# Altium PCB PCB.PcbDoc
Units mil, origin at the board's own origin, x right, y up, seen from the top; angles counter-clockwise.
Board outline 1600 x 1700 mil, 4 copper layers (L1 (Signal), L2 (GND), L3 (GND), L4 (Signal)), stack 61.811 mil thick; 9 components, 7 nets, 25 pads, 2 vias.
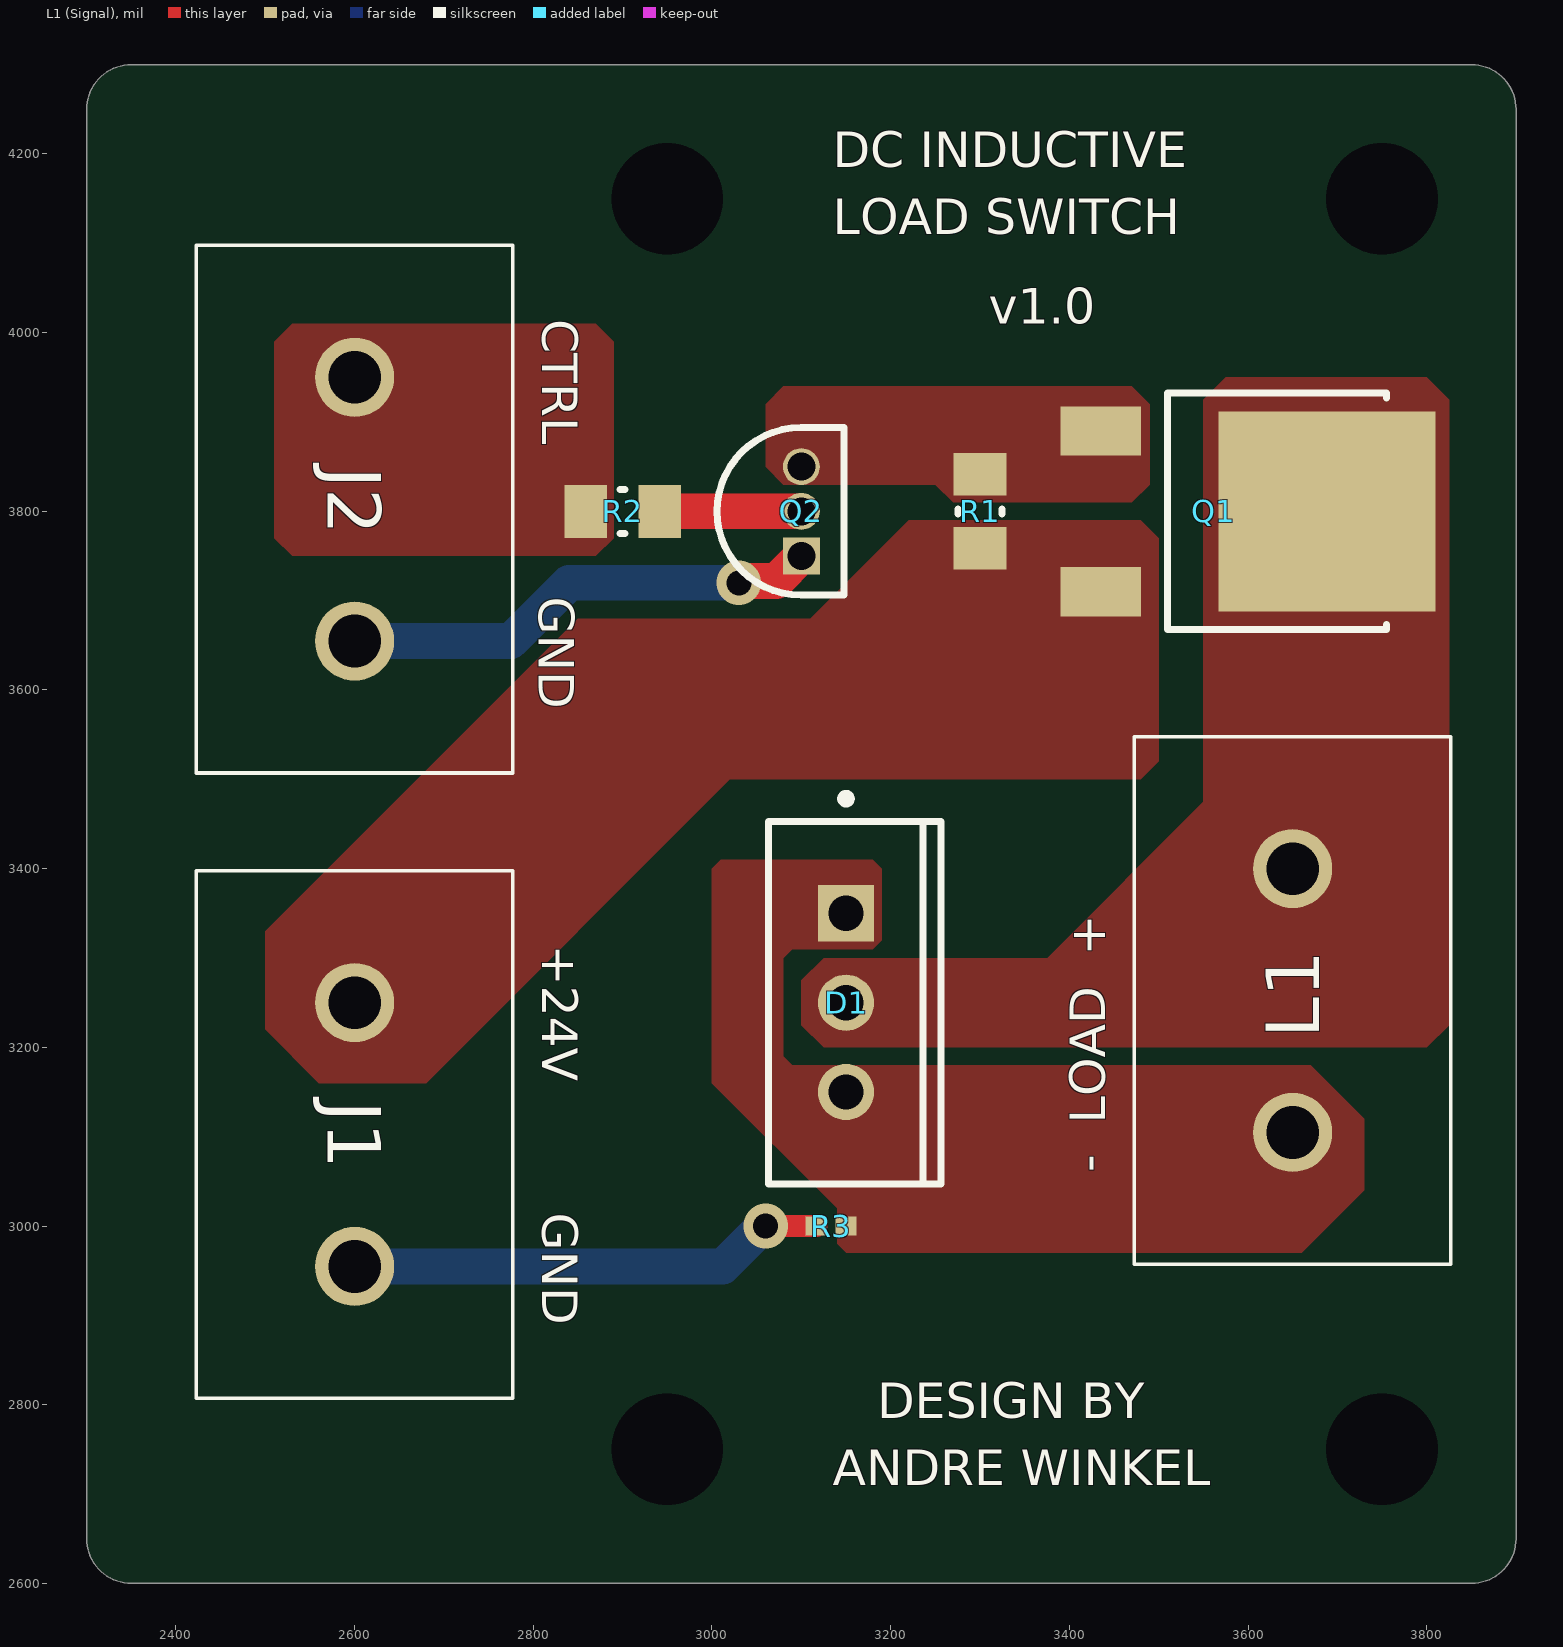
[diagram p0: L1 (Signal) view]
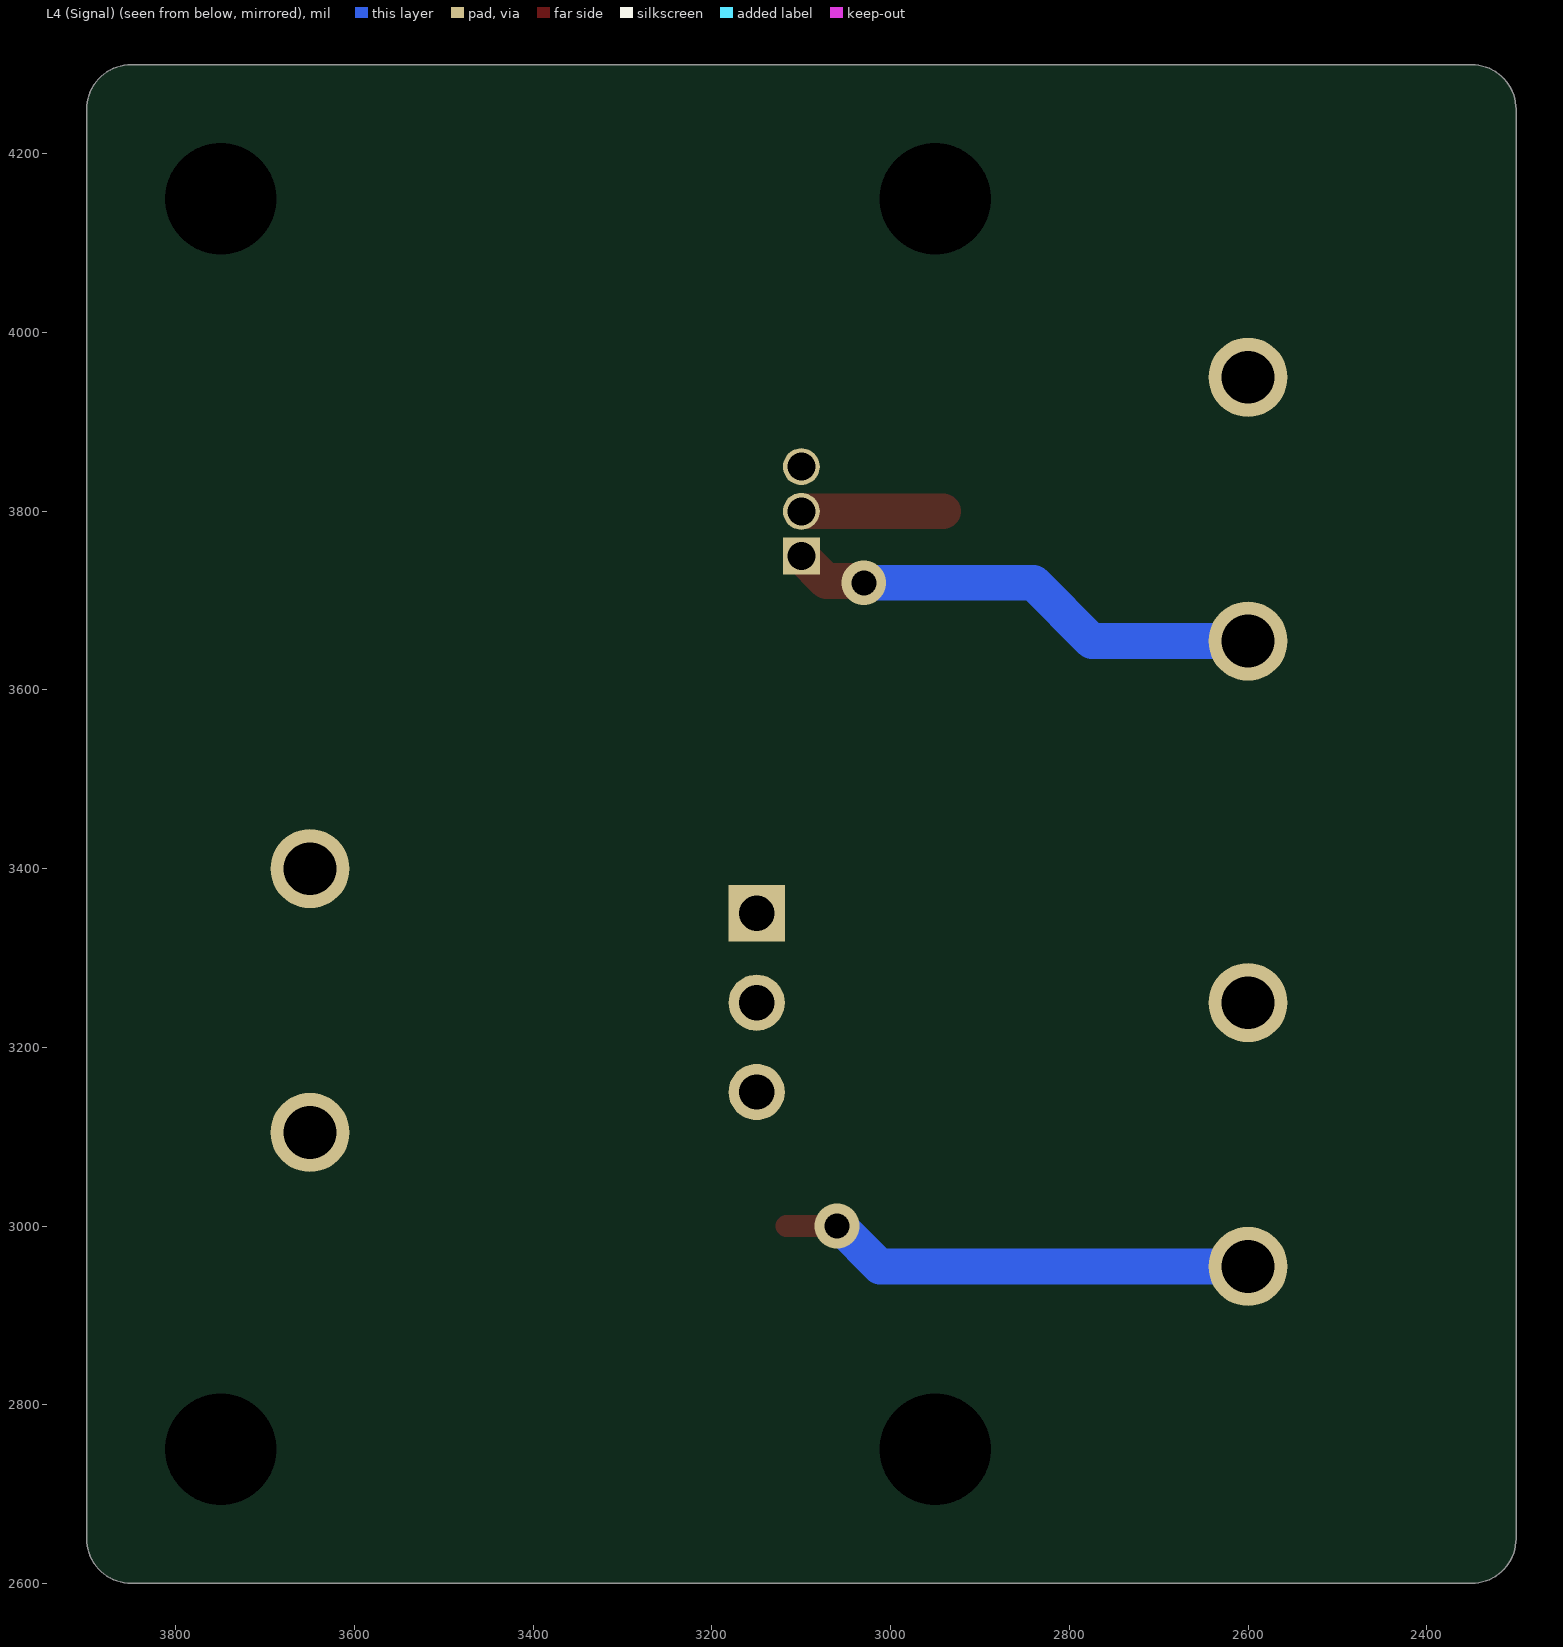
[diagram p1: L4 (Signal) view, seen from below]
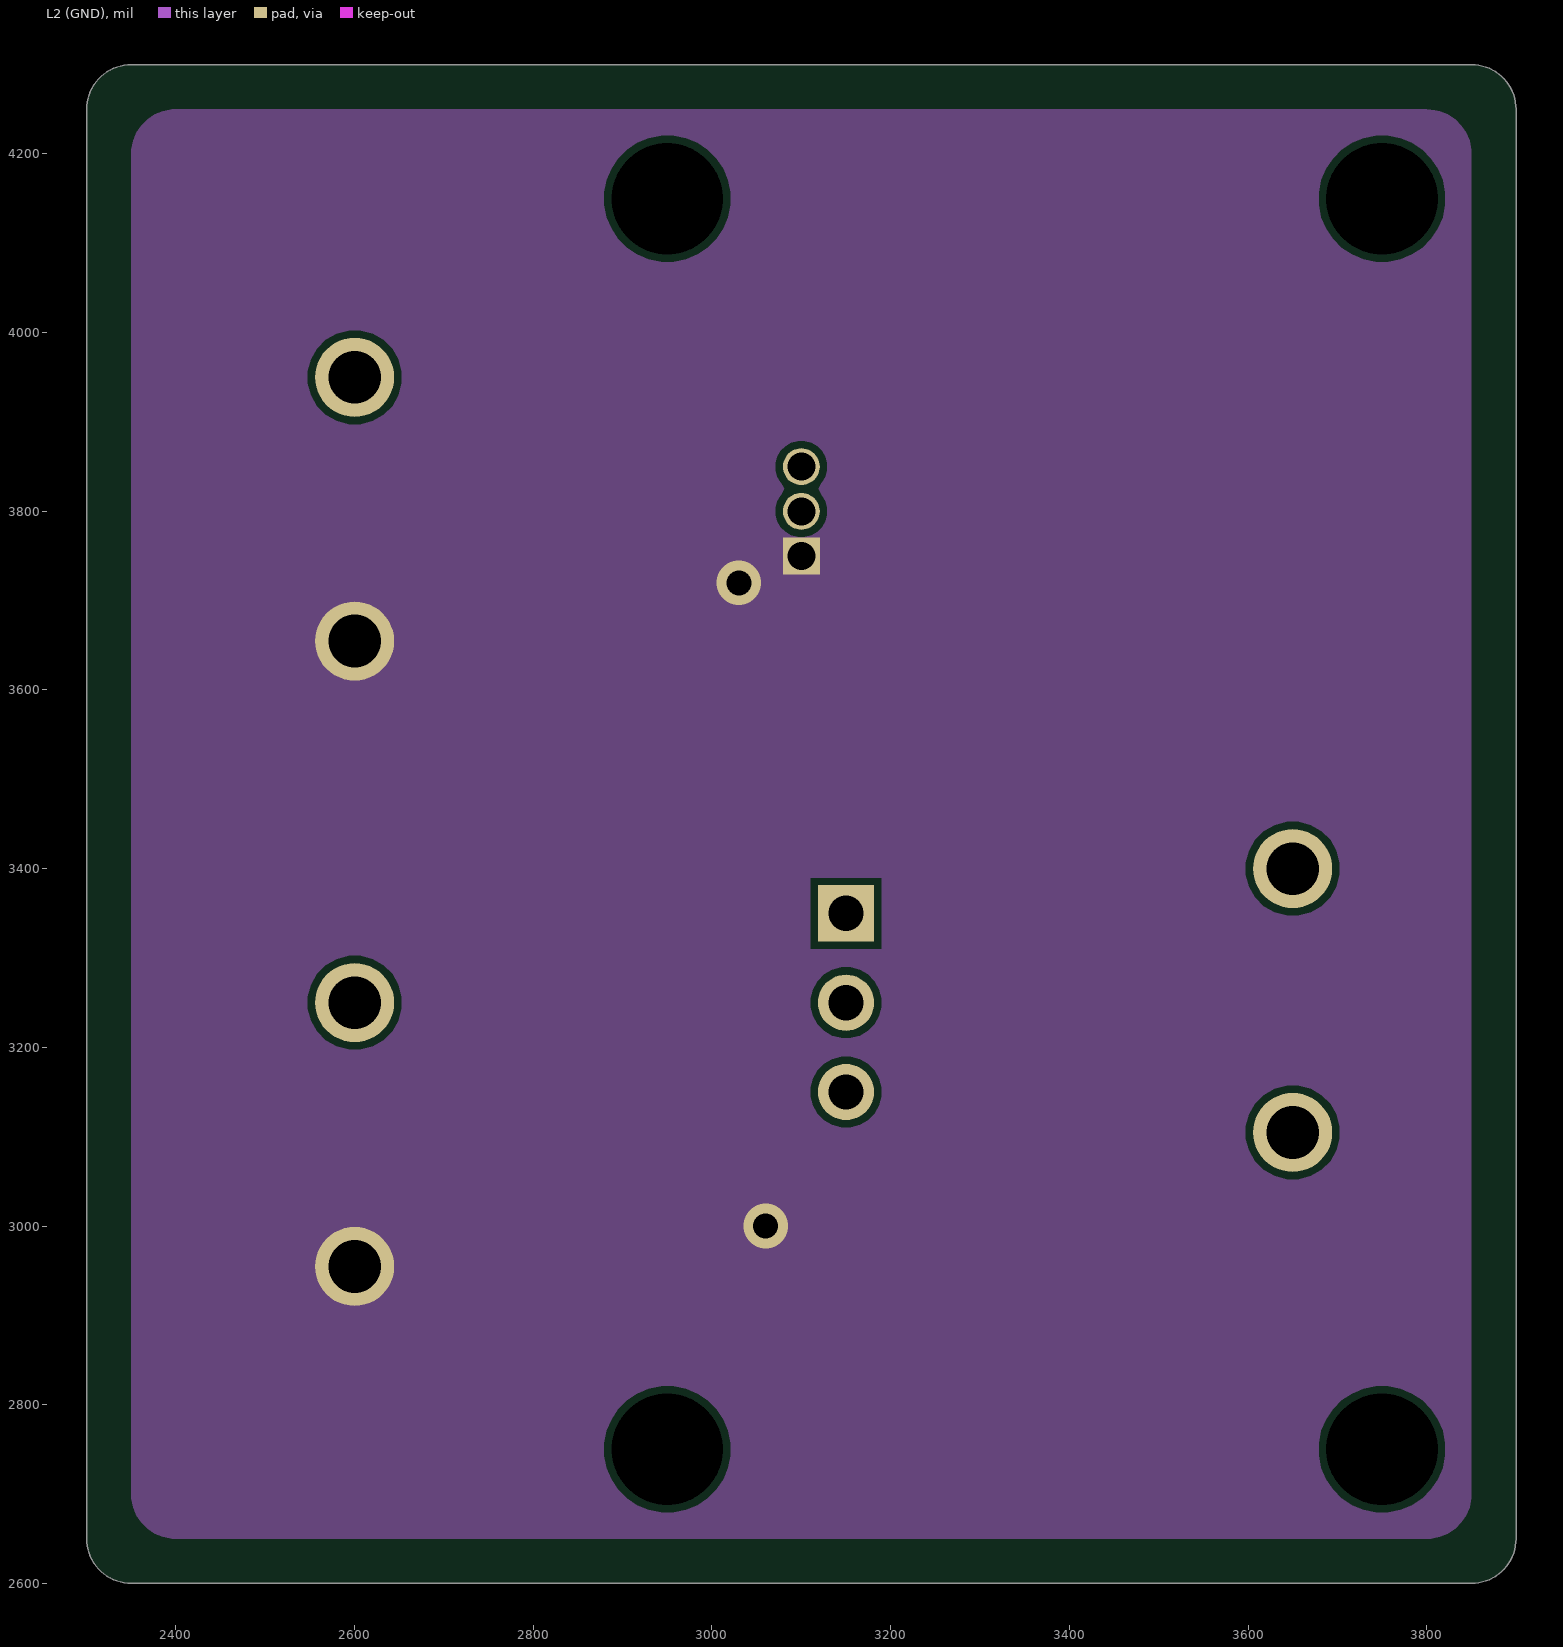
[diagram p2: L2 (GND)]
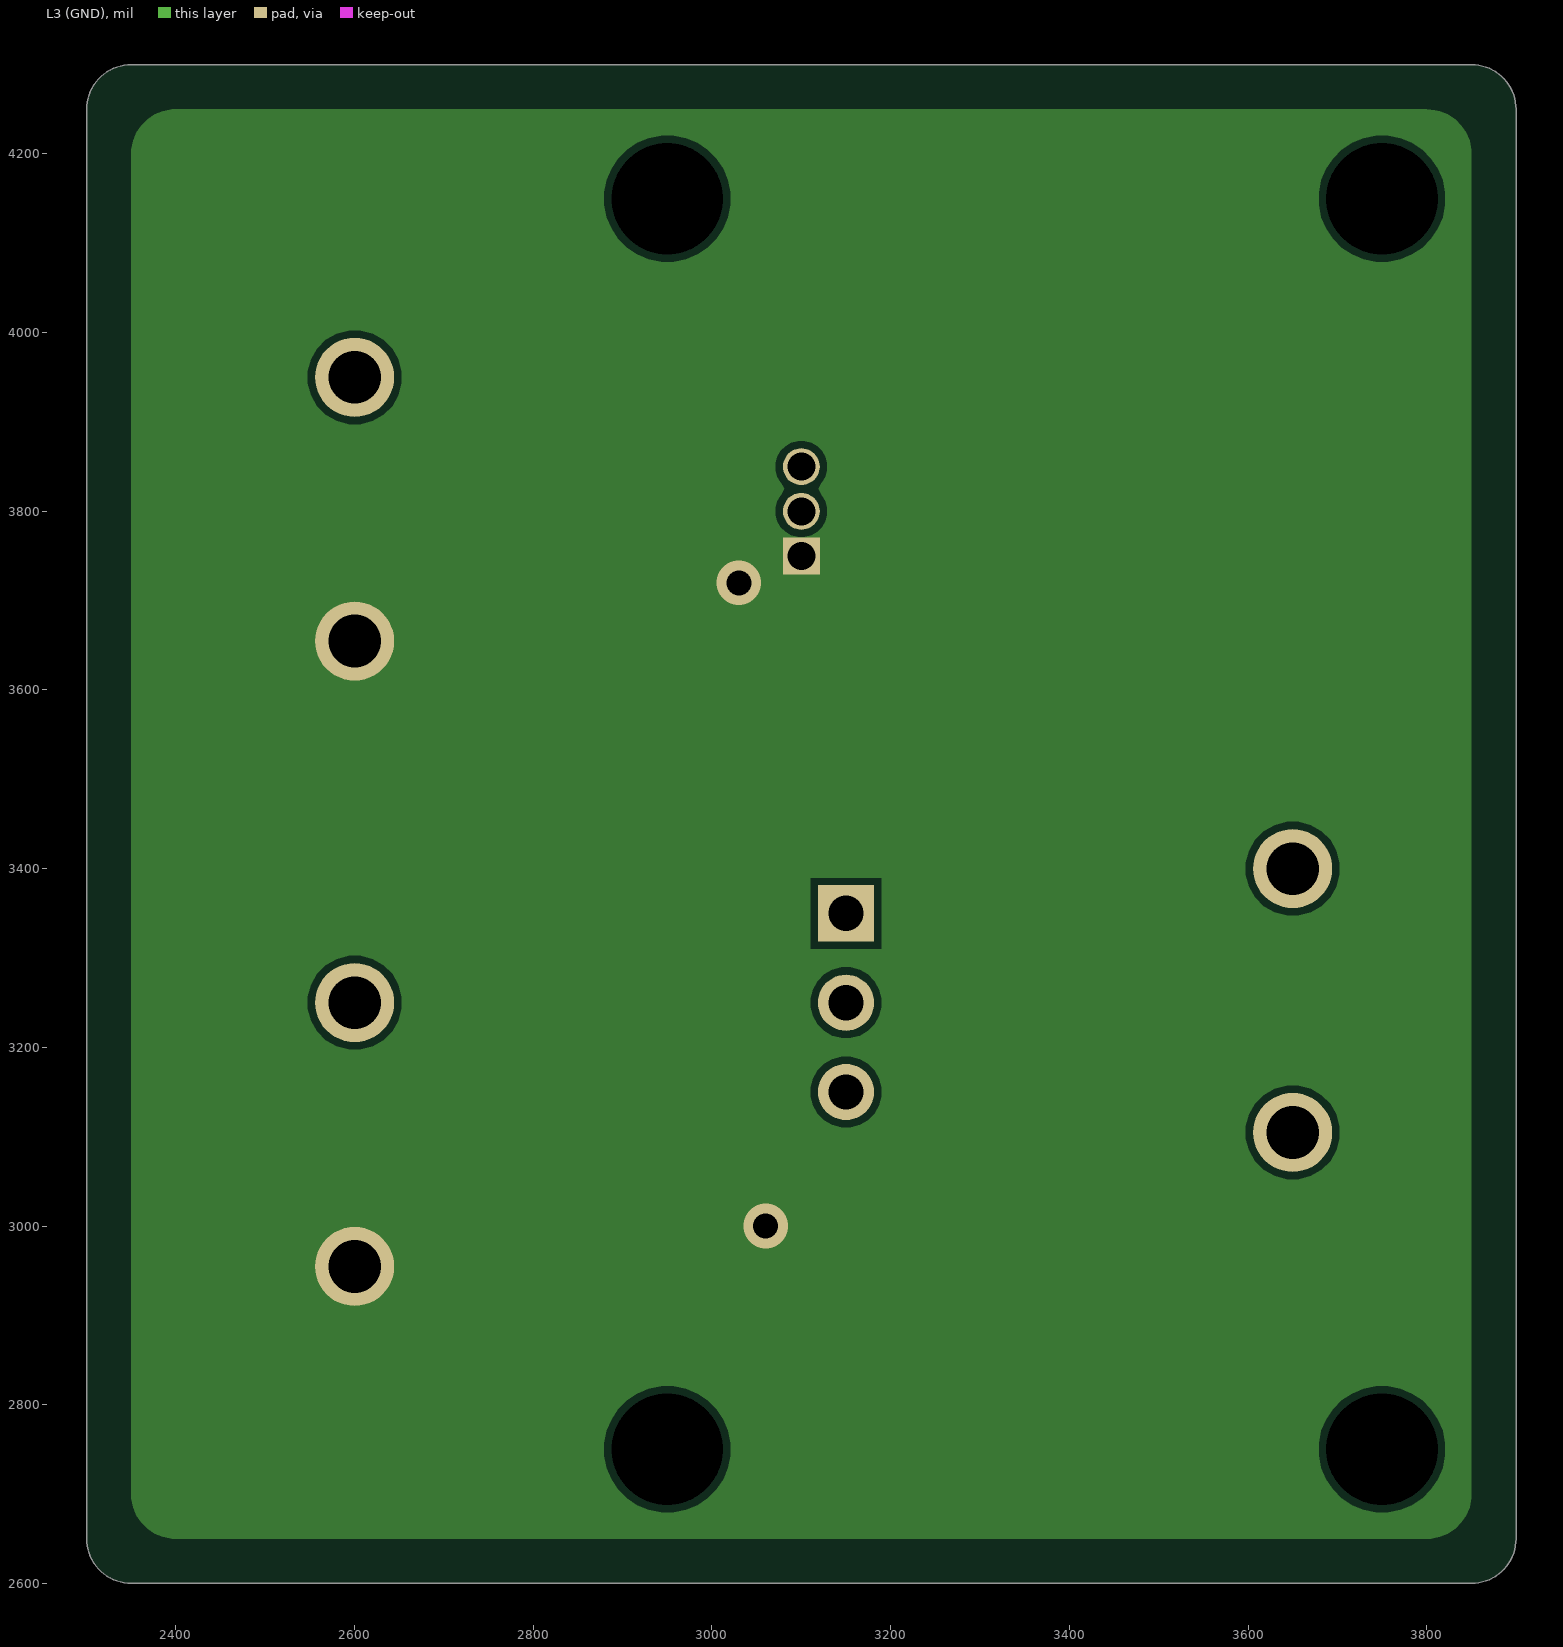
[diagram p3: L3 (GND)]
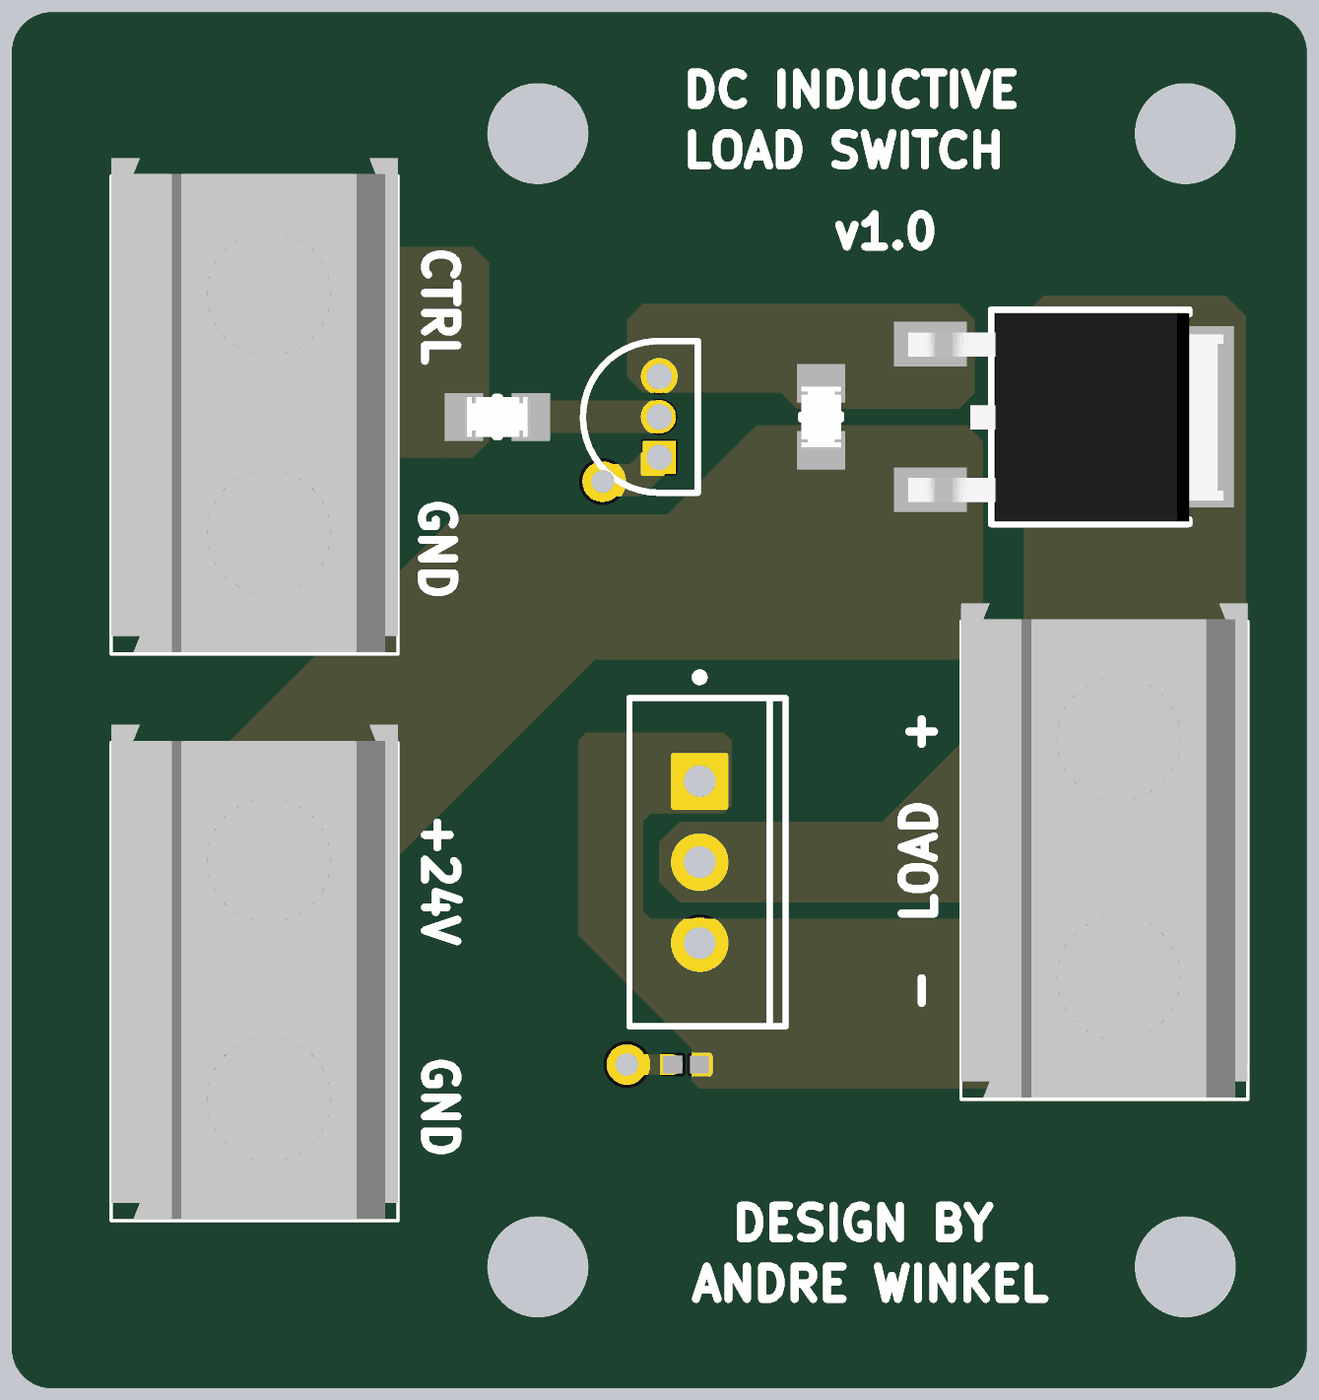
[diagram p4: 3D render of the assembled board from above, using the file's embedded part models]

## Layer stack, top to bottom
Top Solder: solder mask 1, SM-001, Dk 4
L1 (Signal): signal copper 1.378
Dielectric 1: prepreg 7.874, PP-017, Dk 4.4
L2 (GND): signal copper 0.689
Dielectric 3: core 41.929, Core-039, Dk 4.6
L3 (GND): signal copper 0.689
Dielectric 5: prepreg 7.874, PP-017, Dk 4.4
L4 (Signal): signal copper 1.378
Bottom Solder: solder mask 1, SM-001, Dk 4

## Board outline
2300,2650 2300,4250 cw(c2350,4250) 2350,4300 3850,4300 cw(c3850,4250) 3900,4250 3900,2650 cw(c3850,2650) 3850,2600 2350,2600 cw(c2350,2650)

## Design rules (kind name [scope] priority, off if disabled: settings)
Clearance [All] p1: gap=8 ignorepadtopadclearanceinfootprint=FALSE
HoleSize [All] p1: absolutevalues=TRUE maxlimit=200 minlimit=1 maxpercent=80.000 minpercent=20.000
MinimumSolderMaskSliver [All] p1: minsoldermaskwidth=1
PolygonConnect [All] p1: connectstyle=Direct reliefconductorwidth=10 reliefentries=4 polygonreliefangle="90 Angle" airgapwidth=10
RoutingVias [All] p1: holewidth=28 width=50 viastyle="Through Hole" minholewidth=28 minwidth=28 maxholewidth=500 maxwidth=500
SolderMaskExpansion [All] p1: expansion=4 istentingtop=FALSE
SupplyNets "Schematic Supply Nets_2" [InNet('+24V')] p1: voltage=0.000
SupplyNets "Schematic Supply Nets_1" [InNet('+5V')] p2: voltage=0.000
SupplyNets "Schematic Supply Nets" [InNet('GND')] p3: voltage=0.000
UnRoutedNet [All] p1: checkbadconnections=TRUE
Width [All] p1: maxlimit=40 minlimit=8 preferedwidth=10 midlayer1_minwidth=10 midlayer1_maxwidth=10 midlayer2_minwidth=10 midlayer2_maxwidth=10 minimp=50.000000 maximp=50.000000 favimp=50.000000
27 further rules are at their usual default settings.

## Components (designator, comment, footprint, x,y, rotation, side; value= is the part's Value field where it differs from the comment)
D1 "MBR60H100CTG" ONSC-TO-220-3-221A-09_AF 3150,3250 r0 top
J1 "282844-2" 2828442 2600,2954.72 r90 top
J2 "282844-2" 2828442 2600,3654.72 r90 top
L1 "282844-2" 2828442 3650,3104.72 r90 top
Q1 "SQD19P06-60L_T4GE3" FP-T13-0592-MFG 3600,3800 r270 top
Q2 "2N3904BU" FAIR-TO-92 3100,3750 r90 top
R1 "CRCW080510K0FKEA" FP-CRCW0805-e3-IPC_A 3300,3800 r90 top
R2 "CRCW080510K0FKEA" FP-CRCW0805-e3-IPC_A 2900,3800 r0 top
R3 "RC0402JR-072R2L" RESC1005X40X25NL05T10 3133.27,3000 r180 top

## Footprints (in the part's own frame and the unit in brackets; to place one, negate y for a bottom-side part, rotate by r counter-clockwise, add the part's x,y. Pads: shape width x height; smd on the part's side, far side on the other; paste and mask are expansions set on the pad)
2828442 [mm]
  round 2.25 hole 1.5: 1(0,0) 2(7.5,0)
  silkscreen extent -3.75,-4.5 11.25,4.5, body extent -3.69,-4.5 11.81,4.5, height 15.02
FAIR-TO-92 [mm] "TO, 3-Leads, Body Dia 4.79mm, Pitch 1.27mm"
  rect 1.05x1.05 hole 0.8 mask+0.05: 1(0,0)
  round 1.05 hole 0.8 mask+0.05: 2(1.27,0) 3(2.54,0)
  silkscreen extent -1.11,-1.21 3.65,2.4, body extent -1.11,-1.21 3.65,2.4, height 5.33
FP-CRCW0805-e3-IPC_A [mil]
  rect 47.5x59.38 smd paste+0 mask+0: 1(-41.37,0) 2(41.37,0)
  silkscreen extent -3,-25 3,25, body extent -85,-49 85,49, height 10
FP-T13-0592-MFG [mil]
  rect 55x90 smd paste+0 mask+0: 1(-90,-165) 3(90,-165)
  rect 224.02x243.31 smd paste+0 mask+0: 4(0,88.35)
  silkscreen extent -132,-90 132,155, body extent -136,-214 136,214, height 10
ONSC-TO-220-3-221A-09_AF [mm] "FM, 3-Leads, Body 10.3x4.85mm, Pitch 2.54mm"
  rect 1.6x1.6 hole 1: 1(0,2.54)
  round 1.6 hole 1: 2(0,0) 3(0,-2.54)
  silkscreen extent -2.2,-5.15 2.7,5.92, body extent -2.18,-5.15 2.67,5.15, height 19.68
RESC1005X40X25NL05T10 [mm] "Chip Resistor, 2-Leads, Body 1.00x0.50mm, IPC Medium Density"
  rect 0.6x0.55 smd: 1(-0.425,0) 2(0.425,0)
  body extent -0.53,-0.27 0.53,0.28, height 0.4

## Part data
D1: library part CMP-1055-00640-1, "SWITCHMODE(TM) Power Rectifier, 100 V, 60 A, 3-Pin TO-220, Pb-Free, Tube", Manufacturer="On Semiconductor", ComponentLink1Description="Manufacturer URL", ComponentLink1URL=http://www.onsemi.com/, ComponentLink2Description=Datasheet, ComponentLink2URL=http://www.onsemi.cn/pub_link/Collateral/MBR60H100CT-D.PDF, ComponentLink3Description="Package Specification", ComponentLink3URL=http://www.onsemi.cn/pub_link/Collateral/MCR8S-D.PDF, Configuration="Common Cathode", DatasheetVersion="Rev. 5", IFSM Max (A)=350, Mounting Technology="Through Hole", PackageDescription="3-Pin Flange Mount, Vertical Straight Lead, Body 9.97 x 4.445 mm, Pitch 2.54 mm", PackageReference=TO-220-3-221A-09_AF, PackageVersion="Rev. AF", Packing=Tube, PartNumber=MBR60H100CTG, RoHS=TRUE
J1 J2 L1: "Connector", Manufacturer_Name="TE Connectivity", Mouser Part Number=571-282844-2, Arrow Part Number=282844-2, Arrow Price/Stock=https://www.arrow.com/en/products/282844-2/te-connectivity?region=europe, Datasheet Link=https://www.te.com/commerce/DocumentDelivery/DDEController?Action=srchrtrv&DocNm=1-1773458-1_EURO_STYLE_QRG&DocType=Data%20Sheet&DocLang=English&PartCntxt=282844-2&DocFormat=pdf, Height=15.2mm, Manufacturer_Part_Number=282844-2, Mouser Price/Stock=https://www.mouser.co.uk/ProductDetail/TE-Connectivity/282844-2?qs=gdajpSf3VLeviVN6hiKaSg%3D%3D
Q1: library part CMP-02550-000224-1, "MOSFET P-CH 60V 20A TO252AA", Continuous Drain Current=-20A, Drain To Source Breakdown Voltage=-60V, Drain To Source Resistance=0.046Ω, Gate To Source Voltage=20V, Input Capacitace At Vds="1192pF @ -25V", Manufacturer=Vishay, Max Forward Diode Voltage=-1.5V, Max Junction Temp=+175°C, Package=T13-0592, Power Dissipation=46W, Pulse Drain Current=-80A, Temperature="-55°C to +175°C", Temperature Range Low=-55°C, Typ Forward Diode Voltage=-0.85V, Automotive=Yes, Automotive Grade="Grade 0", Category=Trans, ComponentLink2Description=Datasheet, ComponentLink2URL=http://www.vishay.com/docs/65158/sqd19p06.pdf, Depletion Mode=False, Device Class L1="Discrete Semiconductors", Device Class L2=Transistors, Device Class L3=MOSFETs, Digikey Description="MOSFET P-CH 60V 20A TO252AA", Drain To Source Voltage=-60V, Gate Charge At Vgs="27nC @ -10V", Height=2.507mm, Lead Free=Yes, Manufacturer Part Number=SQD19P06-60L_T4GE3, Mouser Description="MOSFET P-Channel Automotive 60V 20A 3-Pin TO-252 T/R", Number Of Channels=1, Number Of P Channels=1, Octopart=https://octopart.com/sqd19p06-60l_t4ge3-vishay-82363551, RoHS=TRUE, Rthja Max=50°C/W, Temperature Range High=+175°C, Threshold Vgs Max=-2.5V, Threshold Vgs Min=-1.5V, Transconductance=20S, Turn Off Delay Time=25ns, Turn On Delay Time=7ns
Q2: library part CMP-2000-04944-1, "NPN General-Purpose Amplifier, 40 V VCEO, 0.2 A, -55 to 150 degC, 2-Pin TO-92, RoHS, Bulk", Manufacturer=FairchildSemiconductor, Maximum Collector Base Voltage=60V, Maximum Collector Emitter Saturation Voltage=0.2@1mA@10mA, Maximum Collector Emitter Voltage=40V, Maximum DC Collector Current=0.2A, Maximum Operating Frequency=300(Min)MHz, Maximum Power Dissipation=625mW, Minimum DC Current Gain=40@0.1mA@1V, Operating Temperature=-55to150degC, Package=3TO-92, Package Description="3-Pin Transistor Outline Package, Body Dia 4.79 mm, Pitch 1.27 mm", Package Reference=TO-92, Category=GPBJT, Datasheet URL=https://datasheet.ciiva.com/4722/2n3904-82270-4722369.pdf, Datasheet Version="Rev. 1.1.0, 10/2014", Manufacturer URL=https://www.fairchildsemi.com/, Mounting=ThroughHole, Packaging=Bulk, Pin Count=3, Rad Hard=No, Type=NPN
R1 R2: library part CMP-2001-04908-2, "RES Thick Film, 10kΩ, 1%, 0.125W, 100ppm/°C, 0805", Case Code (Imperial)=0805, Case Code (Metric)=2012, Max Operating Temperature=155°C, Min Operating Temperature=-55°C, Package Quantity=5000, Power Rating=125mW, Resistance=10kR, Temperature Coefficient=100ppm/°C, Tolerance=1%, Voltage Rating=150V, Case/Package=0805, Composition="Thick Film", Contact Plating=Tin, Depth=1.25mm, Height=0.45mm, Lead Free="Lead Free", Length=2mm, Military Standard=Not, Packaging="Tape and Reel", Radiation Hardening=No, Termination=SMD/SMT, Voltage Rating (DC)=150V, Weight=0.000194oz, Width=1.25mm
R3: library part CMP-2002-07977-1, Manufacturer="Yageo / Phycomp", Resistance=2R2, Part Number=RC0402JR-072R2L

## Free pads (board coordinates)
  round 0 hole 125 unplated: MH(2950,2750) MH(2950,4150) MH(3750,2750) MH(3750,4150)

## Via types
v1: diameter 50, hole 28, L1 (Signal) to L4 (Signal), 2 vias

## Nets (pads, with @x,y where several pads share a name; then routed paths per layer and width w, separated by ;. In a path a pad name is that pad's centre, name@x,y a point inside that pad or via, vN(x,y) a via of type N, cw(c..) or ccw(c..) an arc to the next point about the centre after c; other vN are vias at no path point)
+5V: J2.2 R2.1
+24V: J1.2 Q1.3 R1.1
GND: J1.1 J2.1 Q2.1 R3.2 | length 1074.8
  L1 (Signal) w25: v1(3060,3000) R3.2
  L1 (Signal) w40: v1(3030,3720) 3031.91,3721.91 3071.91,3721.91 Q2.1
  L4 (Signal) w40: J1.1 3012.02,2954.72 3057.29,3000 v1(3060,3000) ; J2.1 2774.72,3654.72 2840,3720 v1(3030,3720)
LOAD_NEG: D1.1 D1.3 L1.1 R3.1
LOAD_POS: D1.2 L1.2 Q1.4
MOS_GATE: Q1.1 Q2.3 R1.2
NPN_B: Q2.2 R2.2 | length 158.6
  L1 (Signal) w40: R2.2 Q2.2

## Polygon pours and split planes (outlines as drawn)
GND on L2 (GND) "NONET_L-01_P-001" (solid, pour order 0): 2400,4250 ccw(c2400,4200) 2350,4200 2350,2700 ccw(c2400,2700) 2400,2650 3800,2650 ccw(c3800,2700) 3850,2700 3850,4200 ccw(c3800,4200) 3800,4250 2600,4250
GND on L3 (GND) "NONET_L-01_P-001" (solid, pour order 2): 2400,4250 ccw(c2400,4200) 2350,4200 2350,2700 ccw(c2400,2700) 2400,2650 3800,2650 ccw(c3800,2700) 3850,2700 3850,4200 ccw(c3800,4200) 3800,4250 2600,4250
LOAD_NEG on L1 (Signal) "NONET_L-01_P-001" (solid, pour order 12): 3190,3320 3180,3310 3090,3310 3080,3300 3080,3190 3090,3180 3670,3180 3730,3120 3730,3040 3660,2970 3150,2970 3140,2980 3140,3020 3000,3160 3000,3400 3010,3410 3180,3410 3190,3400 3190,3340
LOAD_POS on L1 (Signal) "NONET_L-01_P-001" (solid, pour order 10): 3550,3925 3550,3475 3375,3300 3125,3300 3100,3275 3100,3225 3125,3200 3800,3200 3825,3225 3825,3925 3800,3950 3575,3950
MOS_GATE on L1 (Signal) "NONET_L-01_P-001" (solid, pour order 9): 3470,3810 3490,3830 3490,3920 3470,3940 3080,3940 3060,3920 3060,3850 3080,3830 3250,3830 3270,3810 3310,3810
+5V on L1 (Signal) "NONET_L-01_P-001" (solid, pour order 8): 2870,3750 2890,3770 2890,3990 2870,4010 2530,4010 2510,3990 2510,3770 2530,3750
+24V on L1 (Signal) "NONET_L-01_P-001" (solid, pour order 7): 3480,3790 3500,3770 3500,3520 3480,3500 3020,3500 2680,3160 2560,3160 2500,3220 2500,3330 2850,3680 3110,3680 3220,3790 3350,3790

## Silkscreen, mask and mechanical layers (free items; w line width, h text height)
Top Overlay:
  text "DC INDUCTIVE" at 3135,4185 h40
  text "LOAD SWITCH" at 3135,4110 h40
  text "CTRL" at 2810,4015 h40 r270
  text "v1.0" at 3310,4010 h40
  text "GND" at 2806.22,3704.3 h40 r270
  text "+24V" at 2810,3315 h40 r270
  text "-  LOAD  +" at 3440,3060 h40 r90
  text "GND" at 2810,3015 h40 r270
  text "DESIGN BY" at 3185,2785 h40
  text "ANDRE WINKEL" at 3135,2710 h40
Mechanical 1:
  lines w10: 2300,2650 ccw(c2350,2650) 2350,2600 3850,2600 ccw(c3850,2650) 3900,2650 3900,4250 ccw(c3850,4250) 3850,4300 2800,4300 2350,4300 ccw(c2350,4250) 2300,4250 2300,2650